# EAGLE board Laser_Terminal_.b** (EAGLE 9.1.0)
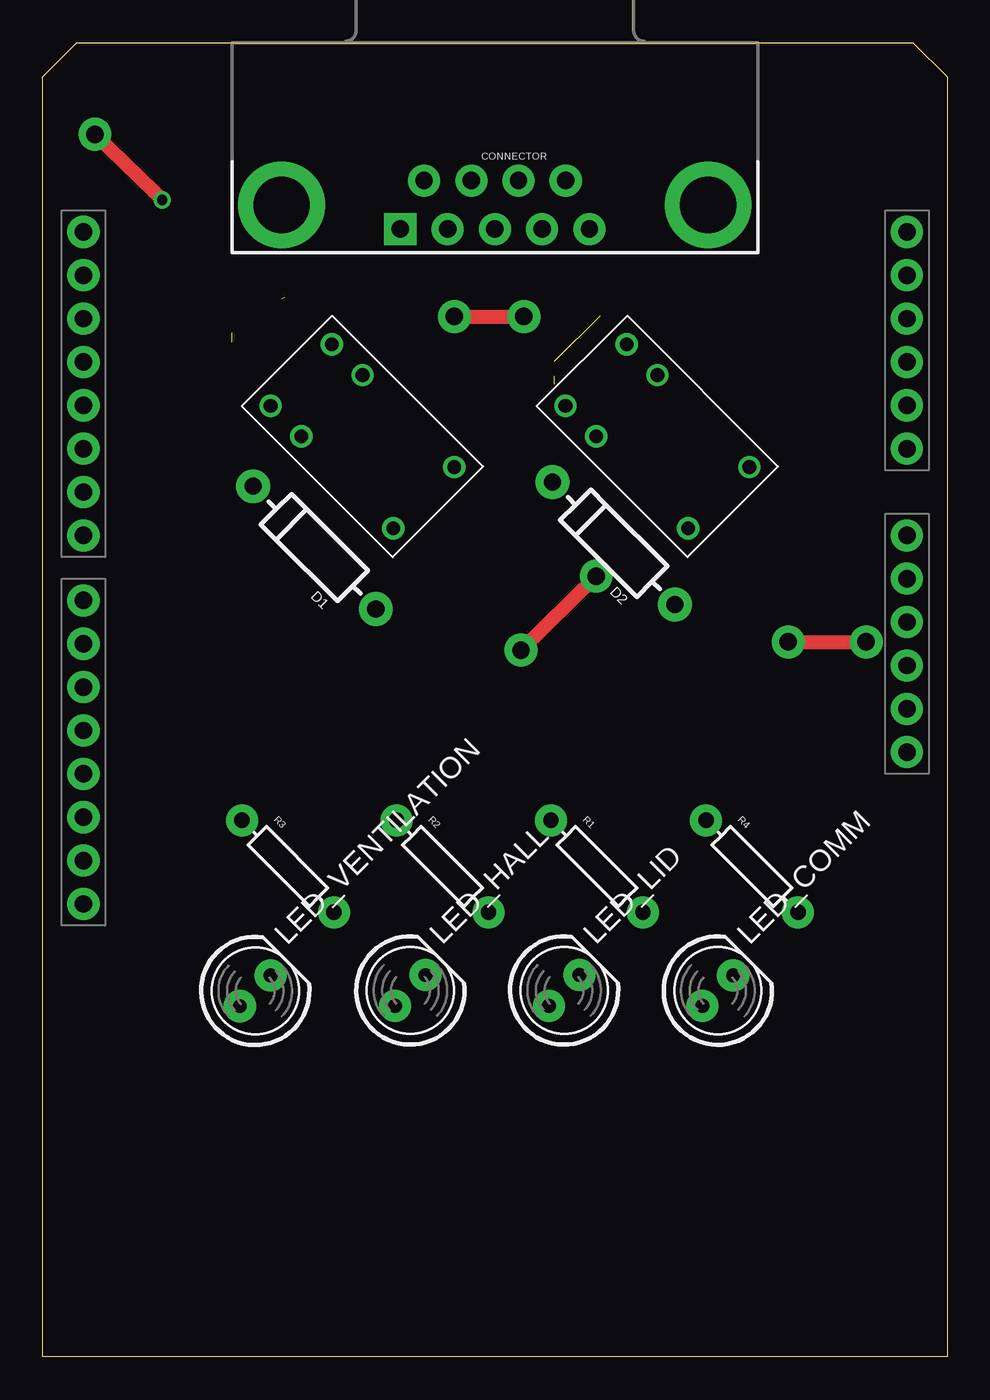
[diagram p0: board, top side]
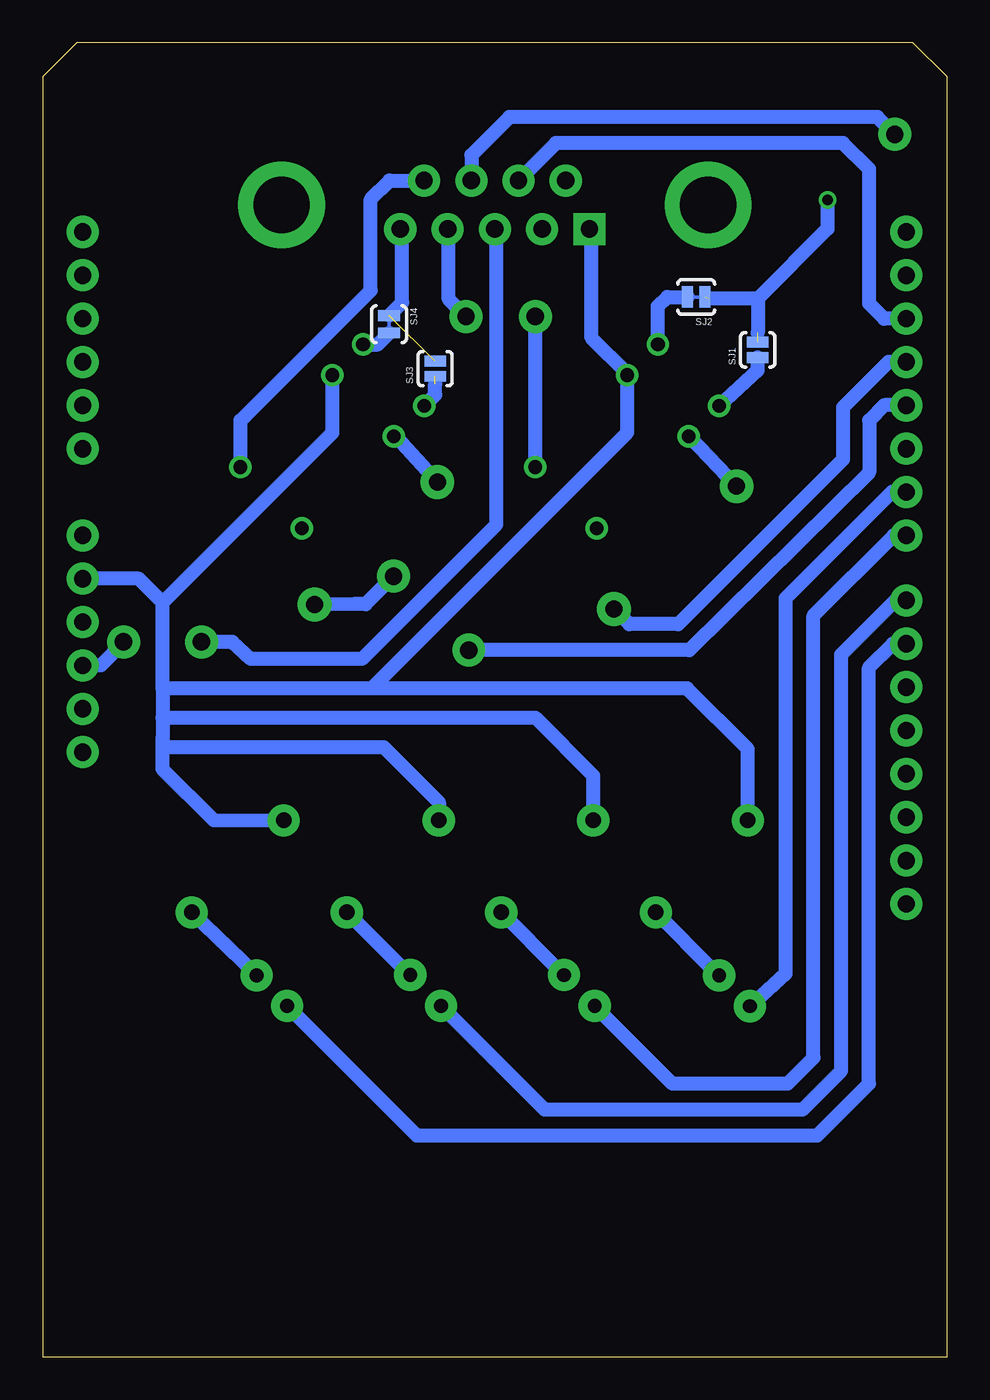
[diagram p1: board, bottom side, seen from below]

Size 53 x 77 mm. Coordinates in mm from the lower left corner, seen from the top.
Outline: 0,75 2,77 51,77 53,75 53,0 0,0 0,75
Copper layers (1*16): Top 0.035mm / dielectric 1.5mm / Bottom 0.035mm
Design rules "default": minimum track width 10mil, minimum drill 24mil, track to track 8mil, track to pad 8mil, pad to pad 8mil, via to via 8mil, smd to smd 8mil, copper to edge 40mil, drill to drill 8mil, minimum pad ring 10mil, minimum via ring 8mil, stop-mask expansion 4mil, vias tented up to drill 0mil, thermal gap 10mil

## Footprints (pad centres in the part's own frame; a part is rotated, then mirrored left to right if it is on the bottom)
DB9_MALE = drill 1.016 pad 1.88: 1 5.54,-1.42; 2 2.77,-1.42; 3 0,-1.42; 4 -2.77,-1.42; 6 4.15,1.42; 7 1.38,1.42; 8 -1.38,1.42; 9 -4.15,1.42 | drill 1.016 pad 1.88 square: 5 -5.54,-1.42 | drill 3.302 pad 5.08: G1 -12.5,0; G2 12.5,0
DIODE-1N4001 = drill 1 pad 1.981: A -5.08,0; C 5.08,0
LED5MM = drill 0.813 pad 1.88: A -1.27,0; K 1.27,0
AXIAL-0.3 = drill 0.9 pad 1.88: P$1 -3.81,0; P$2 3.81,0
TSC_112L3H = drill 0.8: COIL_IN 1.21,8.79; COIL_OUT 6.29,8.79; COM_1 1.21,1.17; COM_2 6.29,1.17; NC 6.29,11.33; NO 1.21,11.33
SJ_2S-NO = smd 0.635 x 1.27: 1 -0.45,0; 2 0.45,0
SJ_2S-TRACE = smd 0.635 x 1.27: 1 -0.508,0; 2 0.508,0
DUEMILANOVE_VIAS = drill 1.016 pad 1.88: 3.3V 50.8,13.97; 5V 50.8,16.51; A0 50.8,29.21; A1 50.8,31.75; A2 50.8,34.29; A3 50.8,36.83; A4 50.8,39.37; A5 50.8,41.91; AREF 2.54,2.54; D2 2.54,36.83; D3 2.54,34.29; D4 2.54,31.75; D5 2.54,29.21; D6 2.54,26.67; D7 2.54,24.13; D8 2.54,20.32; D9 2.54,17.78; D10 2.54,15.24; D11 2.54,12.7; D12 2.54,10.16; D13 2.54,7.62; GND@0 50.8,19.05; GND@1 50.8,21.59; GND@2 2.54,5.08; RES 50.8,11.43; RX 2.54,41.91; TX 2.54,39.37; VIN 50.8,24.13

## Placement (x,y rotation side)
CONNECTOR  DB9  [DB9_MALE]  26.5,67.5 0 top
D1  [DIODE-1N4001]  15.93,47.42 135 top
D2  [DIODE-1N4001]  33.46,47.67 135 top
LED_COMM  [LED5MM]  39.57,21.46 45 top
LED_HALL  [LED5MM]  21.55,21.47 45 top
LED_LID  [LED5MM]  30.56,21.47 45 top
LED_VENTILATION  [LED5MM]  12.46,21.44 45 top
R1  [AXIAL-0.3]  32.48,28.74 315 top
R2  [AXIAL-0.3]  23.43,28.74 315 top
R3  [AXIAL-0.3]  14.38,28.74 315 top
R4  [AXIAL-0.3]  41.57,28.74 315 top
RELAIS_A  TSC-105L3H  [TSC_112L3H]  20.51,46.86 45 top
RELAIS_B  TSC-105L3H  [TSC_112L3H]  37.79,46.86 45 top
SJ1  SOLDERJUMPERNO  [SJ_2S-NO]  11.1,59 90 bottom
SJ2  SOLDERJUMPERTRACE  [SJ_2S-TRACE]  14.7,62.1 180 bottom
SJ3  SOLDERJUMPERNO  [SJ_2S-NO]  30,57.9 90 bottom
SJ4  SOLDERJUMPERTRACE  [SJ_2S-TRACE]  32.7,60.5 270 bottom
U1  ARDUINO_SHIELDNO_SILK  [DUEMILANOVE_VIAS]  -0.15,24 0 top

## Library data of the parts
CONNECTOR D1 D2 LED_COMM LED_HALL LED_LID LED_VENTILATION R1-R4 U1 = SparkFun
RELAIS_A RELAIS_B = Custom
SJ1-SJ4 = RP400N501A

## Nets
GND: CONNECTOR.5 R1.P$1 R2.P$1 R3.P$1 R4.P$1 RELAIS_A.COIL_OUT RELAIS_B.COIL_OUT U1.GND@1
HALL_PIN: CONNECTOR.8 U1.D2
LED_COMM: LED_COMM.A U1.D9
LED_HALL: LED_HALL.A U1.D7
LED_LID: LED_LID.A U1.D8
LED_VENTILATION: LED_VENTILATION.A U1.D6
N$1: D1.C RELAIS_A.COIL_IN
N$2: D2.C RELAIS_B.COIL_IN
N$3: CONNECTOR.4
N$4: CONNECTOR.9
N$7: LED_LID.K R1.P$2
N$8: LED_HALL.K R2.P$2
N$9: LED_VENTILATION.K R3.P$2
N$10: LED_COMM.K R4.P$2
RELAIS_A_ACT: CONNECTOR.7 SJ1.2 SJ2.1
RELAIS_A_COM: CONNECTOR.2 RELAIS_A.COM_2
RELAIS_A_NORMOFF: RELAIS_A.NO SJ1.1
RELAIS_A_NORMON: RELAIS_A.NC SJ2.2
RELAIS_A_PIN: D1.A U1.D3
RELAIS_B_ACT: CONNECTOR.1 SJ3.2 SJ4.1
RELAIS_B_COM: CONNECTOR.6 RELAIS_B.COM_2
RELAIS_B_NORMOFF: RELAIS_B.NO SJ3.1
RELAIS_B_NORMON: RELAIS_B.NC SJ4.2
RELAIS_B_PIN: D2.A U1.D4
VCC: CONNECTOR.3 U1.5V

## Tracks (layer width: path | path; a pad name or v marks a point on that pad's centre or on a via)
GND
  Bottom 0.813: RELAIS_B.COIL_OUT 36.02,54.15 45.97,44.2 | U1.GND@1 47.37,45.59 45.97,44.2 | 45.97,37.45 45.97,36.25 45.99,36.03 | 45.97,39.17 45.97,37.45 | 45.97,39.17 45.97,44.2 | 45.99,36.03 45.99,34.45 42.98,31.45 R4.P$1 | R1.P$1 29.79,32.49 33.02,35.72 45.97,35.72 45.99,36.03 | R2.P$1 20.74,34.05 24.13,37.45 45.97,37.45 | R3.P$1 11.68,35.61 15.24,39.17 33.73,39.17 | 33.73,39.17 45.97,39.17 | 33.73,39.17 18.74,54.16 RELAIS_A.COIL_OUT 18.74,57.6 20.83,59.69 20.83,65.95 CONNECTOR.5
HALL_PIN
  Bottom 0.813: U1.D2 3.68,60.83 4.57,61.72 4.57,69.6 6.1,71.12 22.92,71.12 CONNECTOR.8
LED_COMM
  Bottom 0.813: U1.D9 3.19,41.78 4.58,40.39 4.58,16 7.63,12.95 31.06,12.95 LED_COMM.A
LED_HALL
  Bottom 0.813: U1.D7 3.13,48.13 7.83,43.43 7.83,17.53 9.35,16 16.08,16 LED_HALL.A
LED_LID
  Bottom 0.813: U1.D8 3.03,44.32 6.2,41.15 6.2,16.76 8.49,14.48 23.57,14.48 LED_LID.A
LED_VENTILATION
  Bottom 0.813: U1.D6 3.23,50.67 9.45,44.45 9.45,22.45 LED_VENTILATION.A
N$1
  Bottom 0.813: RELAIS_A.COIL_IN 15.02,53.82 D1.C
N$2
  Bottom 0.813: RELAIS_B.COIL_IN 32.29,53.93 D2.C
N$7
  Bottom 0.813: LED_LID.K 31.62,22.49 R1.P$2
N$8
  Bottom 0.813: LED_HALL.K 22.7,22.62 R2.P$2
N$9
  Bottom 0.813: LED_VENTILATION.K 13.62,22.6 R3.P$2
N$10
  Bottom 0.813: LED_COMM.K 40.59,22.5 R4.P$2
RELAIS_A_ACT  (via drill 0.61, 1.02 pad 1.93)  (2 unrouted)
  Top 0.813: v3.06,71.63 6.49,68.29 v6.99,67.79 v7,67.79
  Bottom 0.813: CONNECTOR.7 27.88,70.42 25.65,72.64 4.08,72.64 v3.06,71.63 | v7,67.79 7,66.1 11.1,62 | 11.1,62 | 11.1,62 | 11.1,62 11.1,60 | 11.1,62 14,62
RELAIS_A_COM  (via drill 1.02 pad 1.93)
  Top 0.813: v24.13,60.96 | v24.13,60.96 v28.19,60.96
  Bottom 0.813: RELAIS_A.COM_2 v24.13,60.96 | v28.19,60.96 29.21,61.98 29.21,66.02 CONNECTOR.2
RELAIS_A_NORMOFF
  Bottom 0.813: RELAIS_A.NO 11.1,57.8 SJ1.1
RELAIS_A_NORMON
  Bottom 0.813: RELAIS_A.NC 16.95,61.55 16.4,62.1 SJ2.2
RELAIS_A_PIN
  Bottom 0.813: U1.D3 3.43,58.29 6.1,55.63 6.1,52.58 15.75,42.93 18.62,42.93 D1.A
RELAIS_B_ACT  (1 unrouted)
  Bottom 0.813: CONNECTOR.1 31.93,66.04 31.93,61.78 SJ4.1
RELAIS_B_COM
  Bottom 0.813: CONNECTOR.6 32.68,68.92 33.78,67.82 33.78,62.48 41.4,54.86 RELAIS_B.COM_2
RELAIS_B_NORMOFF  (1 unrouted)
  Bottom 0.813: RELAIS_B.NO 30,56.36 30,57
RELAIS_B_NORMON
  Bottom 0.813: RELAIS_B.NC 33.37,59.32 SJ4.2
RELAIS_B_PIN  (via drill 1.02 pad 1.93)
  Top 0.813: v28.03,41.4 v32.44,45.74
  Bottom 0.813: U1.D4 3.69,55.75 4.57,54.86 4.57,51.82 15.11,41.4 v28.03,41.4 | v32.44,45.74 34.07,44.1 34.66,44.11 D2.A
VCC  (via drill 1.02 pad 1.93)
  Top 0.813: v43.69,41.89 v48.26,41.89
  Bottom 0.813: U1.5V 49.6,40.51 v48.26,41.89 | CONNECTOR.3 26.42,65.87 26.42,48.77 34.29,40.89 40.8,40.9 41.89,41.89 v43.69,41.89